# Altium PCB PCB2.PcbDoc
Units mm, origin at the board's own origin, x right, y up, seen from the top; angles counter-clockwise.
Board outline 150 x 82 mm, 2 copper layers (Top Layer, Bottom Layer); 8 components, 45 nets, 56 pads, 0 vias.
Unrouted connection lines stored in the file: 11.
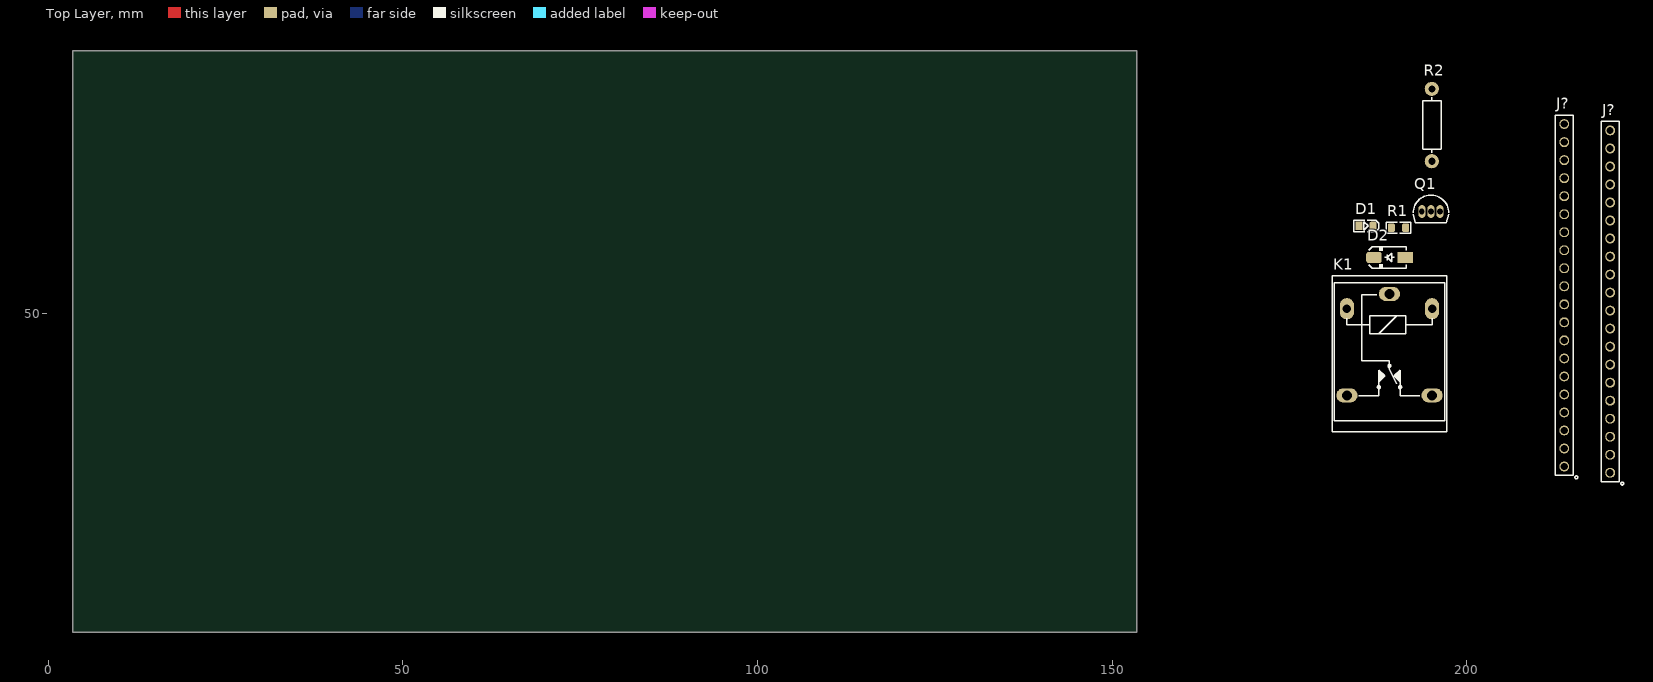
[diagram p0: Top Layer view]
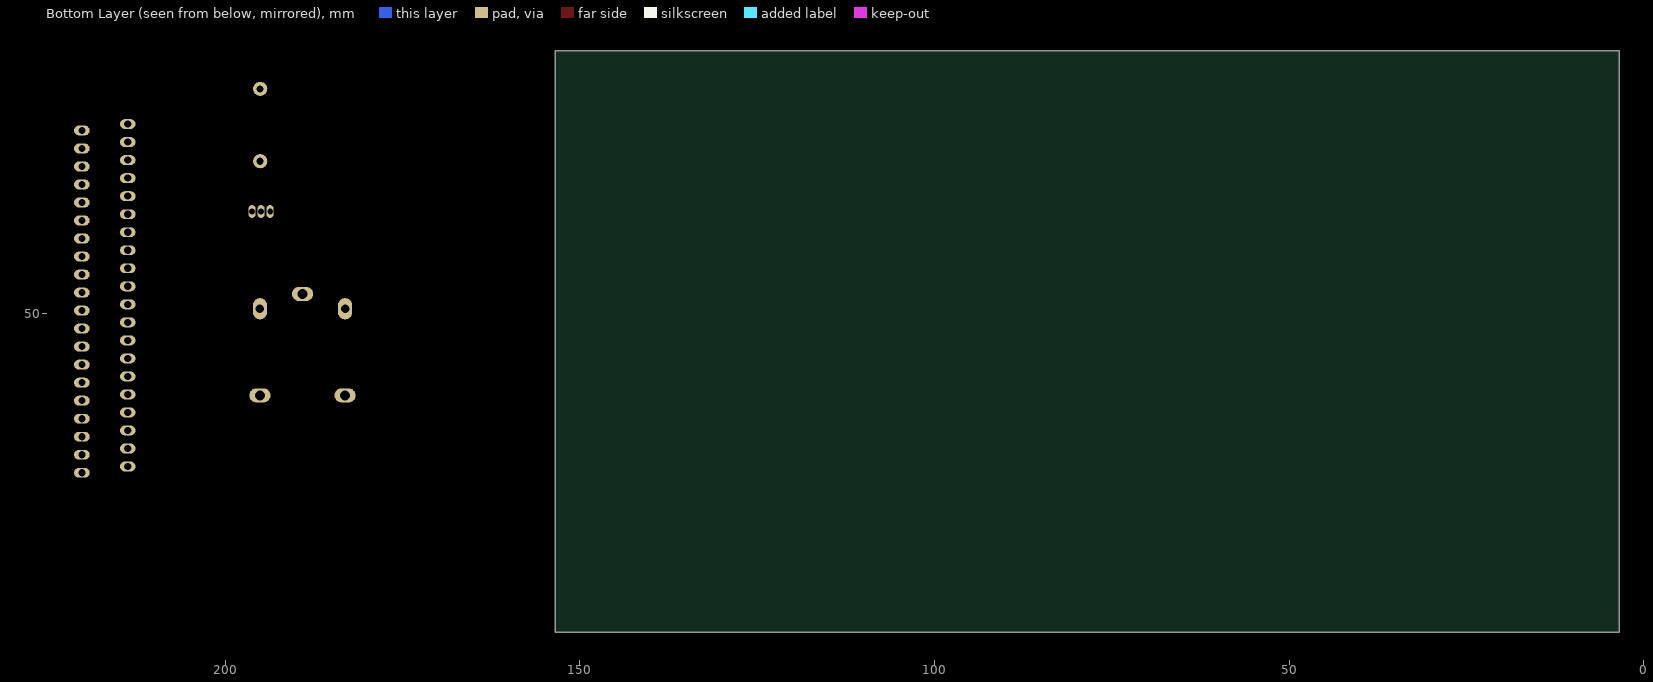
[diagram p1: Bottom Layer view, seen from below]

## Layer stack, top to bottom
Top Solder: solder mask 0.0102, Solder Resist, Dk 3.5
Top Layer: signal copper 0.0356
Dielectric 1: dielectric 0.32, FR-4, Dk 4.8
Bottom Layer: signal copper 0.0356
Bottom Solder: solder mask 0.0102, Solder Resist, Dk 3.5

## Board outline
3.49,5.045 153.49,5.045 153.49,87.045 3.49,87.045

## Design rules (kind name [scope] priority, off if disabled: settings)
Clearance [All] p1: gap=0.254 ignorepadtopadclearanceinfootprint=FALSE except(0: Arc-Hole Track-Hole SMDPad-Hole THPad-Hole Via-Hole Fill-Hole Poly-Hole Region-Hole Text-Hole)
PolygonConnect [All] p1: connectstyle=Relief reliefconductorwidth=0.254 reliefentries=4 polygonreliefangle="90 Angle" airgapwidth=0.254
RoutingVias [All] p1: holewidth=0.711 width=1.27 viastyle="Through Hole" minholewidth=0.711 minwidth=1.27 maxholewidth=0.711 maxwidth=1.27
SolderMaskExpansion [All] p1: expansion=0.102 istentingtop=FALSE
Width [All] p1: maxlimit=0.254 minlimit=0.254 preferedwidth=0.254
30 further rules are at their usual default settings.

## Components (designator, comment, footprint, x,y, rotation, side; value= is the part's Value field where it differs from the comment)
D1 "LED805RED" LED0805RED 185.801,62.357 r0 top
D2 "1N4007" D_SMA 189.103,57.912 r180 top
J? "HDRF20" HDR_F_1X20 213.741,52.578 r90 top
J? "HDRF20" HDR_F_1X20 220.218,51.689 r90 top
K1 "RELAY_SPDT" REL_SPDT_5_2216 189.103,50.673 r0 top
Q1 "C945" TO92_3 194.945,64.389 r0 top
R1 "2.2K" R0805 190.373,62.103 r180 top
R2 "1K" R025W_AX04 195.072,76.581 r270 top

## Footprints (in the part's own frame and the unit in brackets; to place one, negate y for a bottom-side part, rotate by r counter-clockwise, add the part's x,y. Pads: shape width x height; smd on the part's side, far side on the other; paste and mask are expansions set on the pad)
D_SMA [mm] "SMA Molded Diode, 2-Leads, Body 4.3x2.7mm, SOD-128"
  rect 2.2x1.6 smd paste-0.1: 1(-2.2,0)
  rrect50% 2.2x1.6 smd paste-0.1: 2(2.2,0)
  silkscreen extent -2.4,-1.5 2.9,1.5, body extent -2.75,-1.4 2.75,1.4, height 2.6
HDR_F_1X20 [mm] "Connector; Header; 20 Position"
  round 1.4 / inner round 1.4 / far side oval 1.4x2.2 hole 1: 1(-24.13,0) 2(-21.59,0) 3(-19.05,0) 4(-16.51,0) 5(-13.97,0) 6(-11.43,0) 7(-8.89,0) 8(-6.35,0) 9(-3.81,0) 10(-1.27,0) 11(1.27,0) 12(3.81,0) 13(6.35,0) 14(8.89,0) 15(11.43,0) 16(13.97,0) 17(16.51,0) 18(19.05,0) 19(21.59,0) 20(24.13,0)
  silkscreen extent -25.86,-1.9 25.4,1.27, body extent -25.4,-1.27 25.4,1.27, height 8.5
LED0805RED [mm] "LED SMD 0805, RED"
  rect 1x1.2 smd paste-2 mask+0.075: 1(-1,0)
  rrect50% 1x1.2 smd paste-2 mask+0.075: 2(1,0)
  Top Layer pour cut-out: -0.5,0.8 0.5,0.8 0.5,-0.8 -0.5,-0.8
  silkscreen extent -1.7,-0.8 1.8,0.8, body extent -1,-0.63 1,0.63, height 0.7
R025W_AX04 [mm] "RESISTOR 1/4 WATT, AXIAL0.4"
  round 2 hole 1: 1(-5.1,0) 2(5.1,0)
  silkscreen extent -3.9,-1.3 3.9,1.3, body extent -5.38,-1.28 5.38,1.28, height 2.6
R0805 [mm] "CHIP RESISTOR 1/8 WATT ,2.0X1.3mm, 0805, 2012"
  rrect50% 1x1.2 smd paste-0.1 mask+0.075: 1(-1,0) 2(1,0)
  Top Layer pour cut-out: -0.5,0.8 0.5,0.8 0.5,-0.8 -0.5,-0.8
  silkscreen extent -1.7,-0.8 1.7,0.8, body extent -1.15,-0.67 1.15,0.68, height 0.76
REL_SPDT_5_2216 [mm] "RELAY SPDT, OMRON G5LE SERIES, 22X16mm and 18.8x15.4mm, HJR-3FF, RAS-1215"
  oval 3x2 hole 1.4: 1(0,2.1) 2(6,-12.2) 3(-6,-12.2)
  oval 2x3 hole 1.2: 4(-6,0) 5(6,0)
  silkscreen extent -8.1,-17.35 8.1,4.65, body extent -7.95,-15.75 7.95,3.75, height 15.5
TO92_3 [mm] "TO-92, SOT54"
  oval 1x1.8 hole 0.8 mask+0.1: 1(-1.27,0) 2(0,0) 3(1.27,0)
  silkscreen extent -2.5,-1.59 2.5,2.3, body extent -2.38,-1.45 2.38,2.18, height 7.82

## Part data
D1: library part LED_SMD_0805_RED, "LED, SMD, 0805, RED", ASSEMBLY=ASSEMBLY, DESC=DESCRIPTION, MANF=MANF, MANF_P#=MANF_PART#, PARAM2=2.2V, Price=36t@Javan
D2: library part DIODE_SMD_1N4007, "DIODE, GENERAL PURPOSE, 1000V/1A", ASSEMBLY=ASSEMBLY, DESC=DESCRIPTION, MANF=Kingtronics, MANF_P#=M7, PARAM="1000V VRRM", PARAM2=1A, Price=PRICE
J? J?: library part HDR_F_1X20, "CONN, HEADER, Female, pitch: 2.54mm, 20POS"
K1: library part RELAY_SPDT_5_2216_HJR-3FF, "Relay, SPDT, 5P, 19X15mm, 240VAC/7A", MANF=TIANBO, MANF_P#=HJR-3FF--12VDC, PARAM="12V, 30mA, 400Ohm", PARAM2="7A, 240VAC /10A 120VAC/24VDC", Price=PRICE
Q1: library part NPN_C945_TO92, "BJT, NPN, 50v, 0.15A, THD, TO92, BC945", MANF=-, MANF_P#="C945, 2SC945, BC945", PARAM="50v, 0.15A", PARAM2=250mW
R1: library part RES_SMD, "RESISTOR, SMD", ASSEMBLY=ASSEMBLY, DESC=DESCRIPTION, DIST#=MOUSER, MANF=-, MANF_P#=-, PARAM=-W, PARAM2=1%, Price="100= 0.5$"
R2: library part RES_THD, "RESISTOR, THD", ASSEMBLY=ASSEMBLY, DESC=DESCRIPTION, DIST#=MOUSER, MANF="KOA SPEER", MANF_P#=RK73H1ETTP4701F, PARAM=0.063W, PARAM2=1%, Price="100= 0.5$"

## Nets (pads, with @x,y where several pads share a name; then routed paths per layer and width w, separated by ;. In a path a pad name is that pad's centre, name@x,y a point inside that pad or via, vN(x,y) a via of type N, cw(c..) or ccw(c..) an arc to the next point about the centre after c; other vN are vias at no path point)
3.3V: J?.1@220.218,27.559 J?.18@213.741,71.628
5V: J?.3@220.218,32.639
12V: D1.1 D2.2 K1.4
com-Rel01: K1.1
GND: J?.2@220.218,30.099 J?.19@213.741,74.168 J?.20@213.741,76.708 Q1.1
nc-Rel01: K1.2
NetD1_2: D1.2 R1.2
NetD2_1: D2.1 K1.5 Q1.2 R1.1
NetQ1_3: Q1.3 R2.2
no-Rel01: K1.3
OUTPUT1: R2.1
PA0: J?.5@213.741,38.608
PA1: J?.6@213.741,41.148
PA2: J?.7@213.741,43.688
PA3: J?.8@213.741,46.228
PA4: J?.9@213.741,48.768
PA5: J?.10@213.741,51.308
PA6: J?.11@213.741,53.848
PA7: J?.12@213.741,56.388
PA8: J?.16@220.218,65.659
PA9: J?.15@220.218,63.119
PA10: J?.14@220.218,60.579
PA11: J?.13@220.218,58.039
PA12: J?.12@220.218,55.499
PA15: J?.11@220.218,52.959
PB0: J?.13@213.741,58.928
PB1: J?.14@213.741,61.468
PB3: J?.10@220.218,50.419
PB4: J?.9@220.218,47.879
PB5: J?.8@220.218,45.339
PB6: J?.7@220.218,42.799
PB7: J?.6@220.218,40.259
PB8: J?.5@220.218,37.719
PB9: J?.4@220.218,35.179
PB10: J?.15@213.741,64.008
PB11: J?.16@213.741,66.548
PB12: J?.20@220.218,75.819
PB13: J?.19@220.218,73.279
PB14: J?.18@220.218,70.739
PB15: J?.17@220.218,68.199
PC13: J?.2@213.741,30.988
PC14: J?.3@213.741,33.528
PC15: J?.4@213.741,36.068
RESET: J?.17@213.741,69.088
VBAT: J?.1@213.741,28.448

## Silkscreen, mask and mechanical layers (free items; w line width, h text height)
Mechanical 1:
  the board outline again, w0.24